# Altium PCB STCLock.PcbDoc
Units mm, origin at the board's own origin, x right, y up, seen from the top; angles counter-clockwise.
Board outline 109.22 x 79.25 mm, 2 copper layers (Top Layer, Bottom Layer); 27 components, 33 nets, 125 pads, 16 vias.
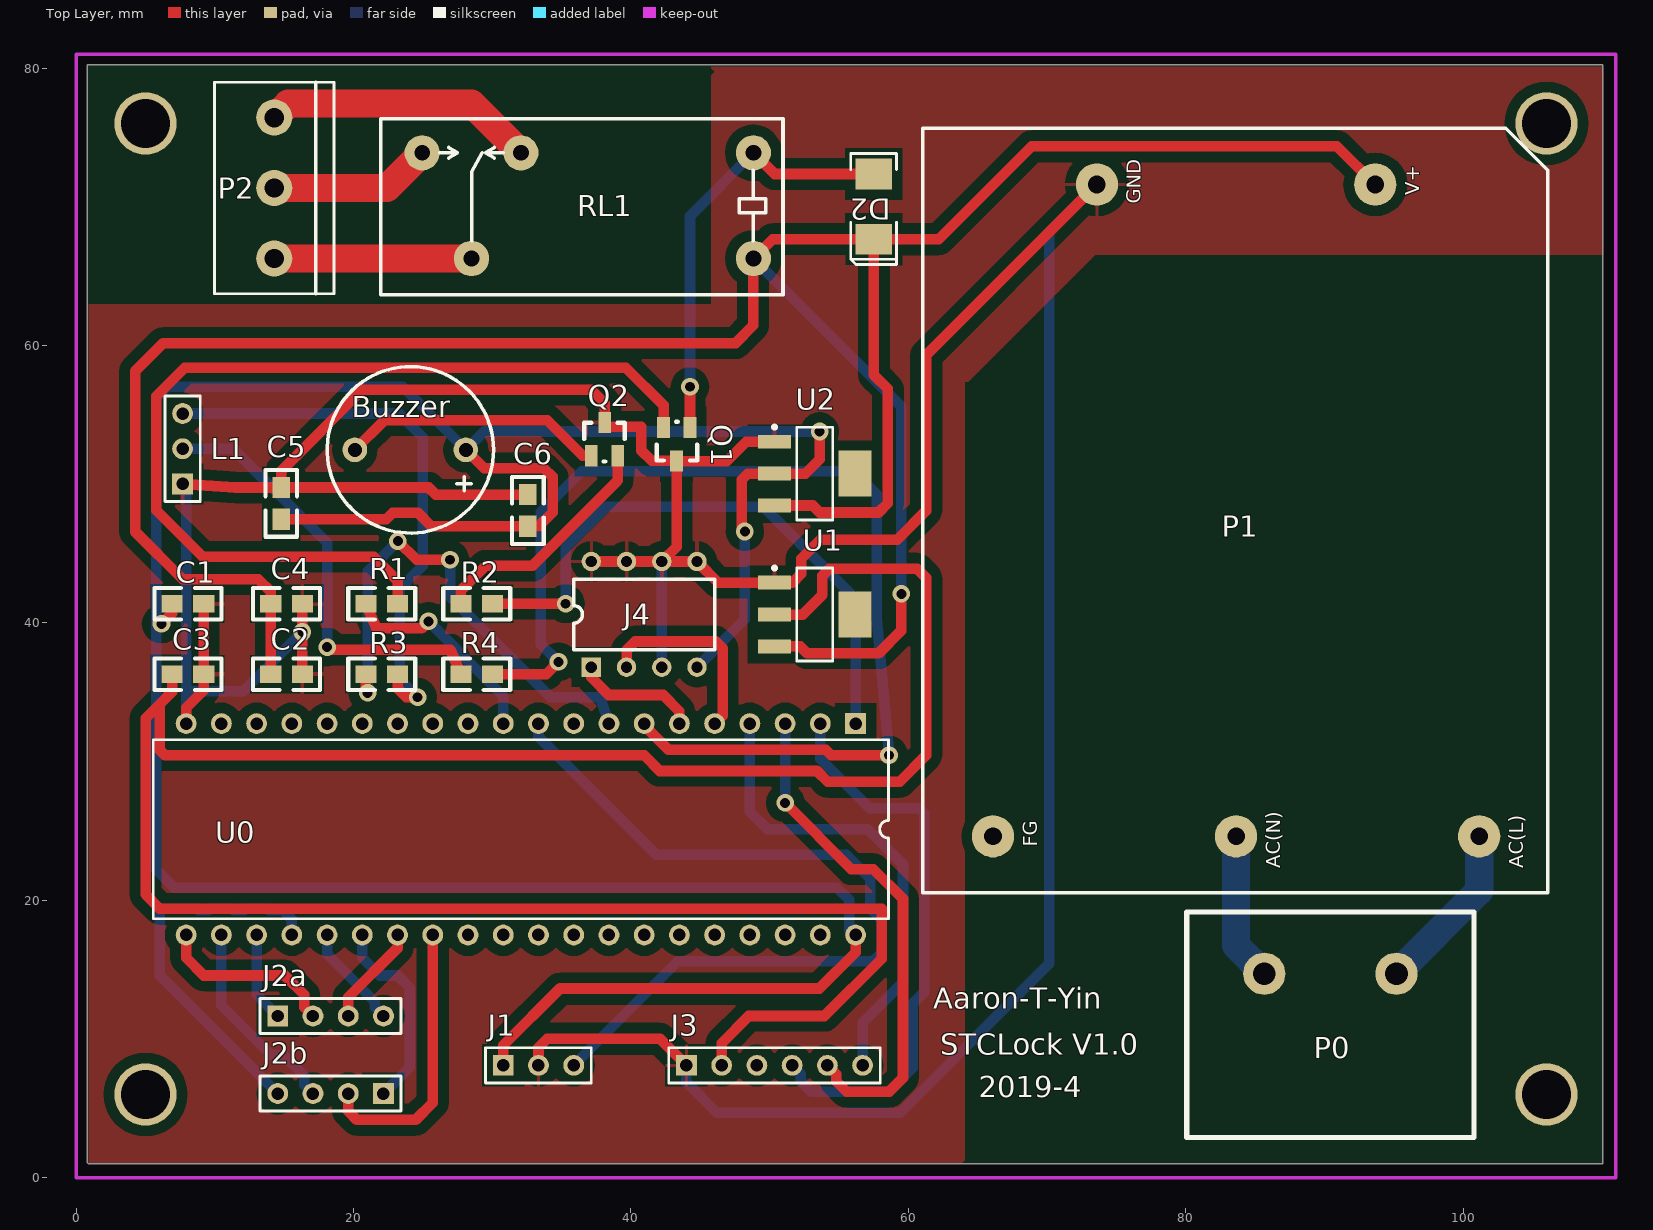
[diagram p0: Top Layer view]
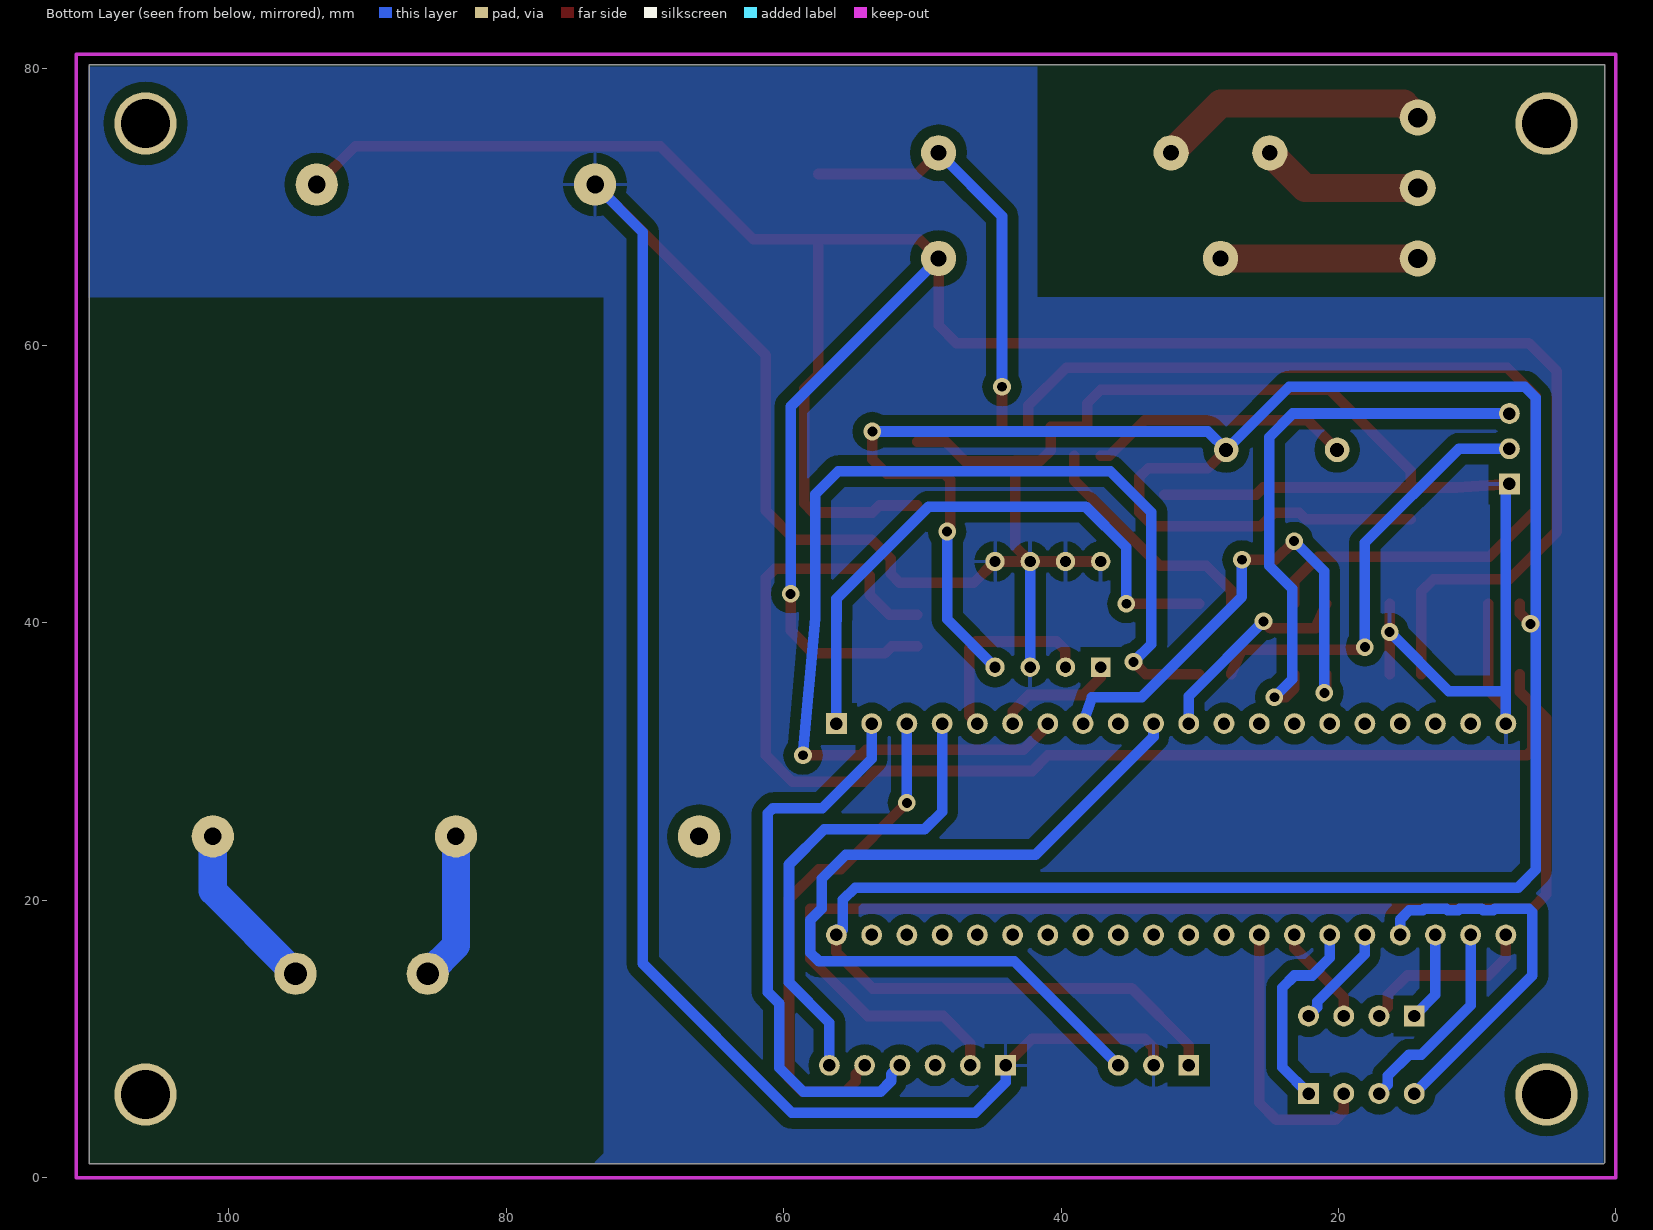
[diagram p1: Bottom Layer view, seen from below]

## Layer stack, top to bottom
Top Layer: signal copper 0.0356
Dielectric: dielectric 0.32, FR-4, Dk 4.8
Bottom Layer: signal copper 0.0356

## Board outline
0.818,80.238 0.818,1.069 0.897,0.99 110.038,0.99 110.038,80.238 0.818,80.238

## Design rules (kind name [scope] priority, off if disabled: settings)
Clearance [All] p1: gap=0.762
FabricationTestPointUsage TestPointUsage [All] p1: valid=0 allowmultiple=FALSE
FabricationTestpoint Testpoint [All] p1: side=3 testpointundercomponent=TRUE minsize=1.016 maxsize=2.54 preferedsize=1.524 minholesize=0 maxholesize=1.016 preferedholesize=0.813 testpointgrid=0.025 allowsidetop=TRUE allowsidebottom=TRUE usegrid=TRUE gridtolerance=0
PolygonConnect [All] p1: connectstyle=Relief reliefconductorwidth=0.254 reliefentries=4 polygonreliefangle="90 Angle"
RoutingLayers [All] p1 off: top layer_v5=TRUE bottom layer_v5=TRUE
RoutingVias [All] p1: holewidth=0.711 width=1.27 viastyle="Through Hole" minholewidth=0.711 minwidth=1.27 maxholewidth=0.711 maxwidth=1.27
SilkscreenOverComponentPads [All] p1: minsilkscreentomaskgap=0.254
SolderMaskExpansion [All] p1: expansion=0.102
Width [All] p1: maxlimit=2.032 minlimit=0.762 preferedwidth=0.762
24 further rules are at their usual default settings.

## Components (designator, comment, footprint, x,y, rotation, side; value= is the part's Value field where it differs from the comment)
Buzzer "Buzzer" BUZ8/12 27.996,52.552 r180 top
C1 "224" 0805 9.2,41.376 r180 top
C2 "224" 0805 16.312,36.296 r180 top
C3 "224" 0805 9.2,36.296 r180 top
C4 "224" 0805 16.312,41.376 r180 top
C5 "103" 0805 14.788,47.472 r90 top
C6 "103" 0805 32.568,46.964 r90 top
D2 "DIODE" 5819 57.46,70.332 r180 top
J1 "GPS" HDR1X3 30.79,8.102 r0 top
J2a "Header 4" HDR1X4 14.534,11.658 r0 top
J2b "Header 4" HDR1X4 22.154,6.07 r180 top
J3 "LCD12864" HDR1X6 43.998,8.102 r0 top
J4 "AT24C02" DIP8 37.14,36.804 r90 top
L1 "LED_3_K" HDR1X3 7.676,50.012 r90 top
P0 "Header 2" DG46G_2 85.654,14.706 r0 top
P1 "LAP5-220SXX" LAP5-220SXX 66.096,24.612 r90 top
P2 "Header 3" 111 14.28,66.268 r90 top
Q1 "3906" SOT-23-et 44.252,54.076 r180 top
Q2 "3906" SOT-23-et 37.14,52.044 r0 top
R1 "Res Semi" 0805 20.884,41.376 r0 top
R2 "Res Semi" 0805 30.028,41.376 r180 top
R3 "Res2" 0805 20.884,36.296 r0 top
R4 "Res2" 0805 30.028,36.296 r180 top
RL1 "G2R-1" G2R-1 48.824,66.268 r180 top
U0 "STC89C52RC" SOT129-1 32.06,25.12 r180 top
U1 "LM1117-3.3V" AMS1117 50.348,42.9 r0 top
U2 "LM1117-5V" AMS1117 50.348,53.06 r0 top

## Footprints (in the part's own frame and the unit in brackets; to place one, negate y for a bottom-side part, rotate by r counter-clockwise, add the part's x,y. Pads: shape width x height; smd on the part's side, far side on the other; paste and mask are expansions set on the pad)
111 [mm]
  round 2.6 hole 1.4: 1(0,0) 2(5.08,0) 3(10.16,0)
  silkscreen extent -2.54,-4.3 12.7,4.3
0805 [mil]
  rect 60x50 smd: 1(0,0) 2(90,0)
  silkscreen extent -50,-45 140,45, body extent 0,-26 90,27, height 20
5819 [mm]
  rect 2.6x2.2 smd: 1(-0.039,-2.028) 2(-0.039,2.672)
  silkscreen extent -1.69,-3.5 1.61,4.5
AMS1117 [mm]
  rect 2.4x1 smd: 1(0,0) 2(0,-2.3) 3(0,-4.6)
  rect 2.4x3.3 smd: 4(5.8,-2.3)
  silkscreen extent -0.12,-5.65 4.2,1.17, body extent 1.05,-5.65 4.75,1.05, height 1.8
BUZ8/12 [mil]
  round 70 hole 40: 1(-3.78,3.11) 2(311.18,3.11)
  silkscreen extent -83,-233 390,239
DG46G_2 [mil]
  round 120 hole 65: 1(0,0) 2(375,0)
  silkscreen extent -220,-465 595,175
DIP8 [mil]
  rect 55x55 hole 32: 1(0,0)
  round 55 hole 32: 2(0,-100) 3(0,-200) 4(0,-300) 5(300,-300) 6(300,-200) 7(300,-100) 8(300,0)
  silkscreen extent 50,-350 250,50
G2R-1 [mil]
  round 100 hole 45: 1(0,-300) 2(660,-300) 3(940,-300) 4(800,0) 5(0,0)
  silkscreen extent -84,-397 1058,103
HDR1X3 [mm] "Connector; Header; 3 Position"
  rect 1.5x1.5 hole 0.9: 1(0,0)
  round 1.5 hole 0.9: 2(2.54,0) 3(5.08,0)
  silkscreen extent -1.27,-1.27 6.35,1.27
HDR1X4 [mm] "Connector; Header; 4 Position"
  rect 1.5x1.5 hole 0.9: 1(0,0)
  round 1.5 hole 0.9: 2(2.54,0) 3(5.08,0) 4(7.62,0)
  silkscreen extent -1.27,-1.27 8.89,1.27
HDR1X6 [mm] "Connector; Header; 6 Position"
  rect 1.5x1.5 hole 0.9: 1(0,0)
  round 1.5 hole 0.9: 2(2.54,0) 3(5.08,0) 4(7.62,0) 5(10.16,0) 6(12.7,0)
  silkscreen extent -1.27,-1.27 13.97,1.27
LAP5-220SXX [mil]
  round 120 hole 50: 1(0,0) 2(0,-690) 3(0,-1380) 4(1850,-1085) 8(1850,-295)
  silkscreen extent -160,-1575 2010,200
SOT129-1 [mm] "DIP; 40 Leads; Row Spacing 15.24 mm; Pitch 2.54 mm"
  rect 1.5x1.5 hole 0.9: 1(-24.13,-7.62)
  round 1.5 hole 0.9: 2(-21.59,-7.62) 3(-19.05,-7.62) 4(-16.51,-7.62) 5(-13.97,-7.62) 6(-11.43,-7.62) 7(-8.89,-7.62) 8(-6.35,-7.62) 9(-3.81,-7.62) 10(-1.27,-7.62) 11(1.27,-7.62) 12(3.81,-7.62) 13(6.35,-7.62) 14(8.89,-7.62) 15(11.43,-7.62) 16(13.97,-7.62) 17(16.51,-7.62) 18(19.05,-7.62) 19(21.59,-7.62) 20(24.13,-7.62) 21(24.13,7.62) 22(21.59,7.62) 23(19.05,7.62) 24(16.51,7.62) 25(13.97,7.62) 26(11.43,7.62) 27(8.89,7.62) 28(6.35,7.62) 29(3.81,7.62) 30(1.27,7.62) 31(-1.27,7.62) 32(-3.81,7.62) 33(-6.35,7.62) 34(-8.89,7.62) 35(-11.43,7.62) 36(-13.97,7.62) 37(-16.51,7.62) 38(-19.05,7.62) 39(-21.59,7.62) 40(-24.13,7.62)
  silkscreen extent -26.5,-6.45 26.5,6.45
SOT-23-et [mil]
  rect 36x60 smd: 1(0,0) 2(75,0) 3(38,95)
  silkscreen extent -21,-16 95,94

## Part data
Buzzer: "Magnetic Transducer Buzzer"
C1 C2 C3 C4 C5 C6: library part CAP, "Capacitor"
D2: "Diode"
J1: library part "Header 3", "Header, 3-Pin"
J2a J2b: "Header, 4-Pin"
J3: library part "Header 6", "Header, 6-Pin"
J4: library part LM75A
P0: "Header, 2-Pin"
P2: "Header, 3-Pin"
Q1 Q2: library part 2N3906, "PNP General Purpose Amplifier"
R1 R2: "Semiconductor Resistor"
R3 R4: "Resistor"
U0: library part P89C51X2BN, "80C51 8-Bit Flash Microcontroller Family, 4 kB Flash"
U1 U2: library part LM1117

## Free pads (board coordinates)
  round 4.5 hole 3.5: 0(5,76) 1(5,6) 2(106,76) 3(106,6)

## Via types
v1: diameter 1.27, hole 0.711, Top Layer to Bottom Layer, 16 vias

## Nets (pads, with @x,y where several pads share a name; then routed paths per layer and width w, separated by ;. In a path a pad name is that pad's centre, name@x,y a point inside that pad or via, vN(x,y) a via of type N, cw(c..) or ccw(c..) an arc to the next point about the centre after c; other vN are vias at no path point)
+3.3V: C3.2 J3.2 U1.2 | length 175.9
  Top Layer w0.762: C3.2 6.914,35.026 6.025,34.137 ; J3.2 46.538,9.702 48.494,11.658 53.943,11.658 58.083,15.798 58.083,19.393 6.037,19.393 5.009,20.421 5.009,33.121 6.025,34.137 ; U1.2 52.38,40.6 53.802,42.022 53.802,43.408 54.281,43.886 60.635,43.886 61.27,43.251 61.27,30.454 59.365,28.549 54.183,28.549 53.409,29.323 42.075,29.323 40.944,30.454 6.406,30.454 6.025,30.835 6.025,34.137
+5V: Buzzer.1 C1.2 C5.1 C6.1 J1.1 J4.4 U0.40 U2.2 | length 225.1
  Top Layer w0.762: v1(6.152,39.928) 6.914,40.69 C1.2 ; C5.1 22.357,47.472 22.812,47.927 24.643,47.927 25.606,46.964 C6.1 33.33,46.964 34.346,47.98 34.346,50.52 33.711,51.155 29.41,51.155 Buzzer.1 ; J1.1 30.79,9.55 34.879,13.639 53.574,13.639 56.19,16.255 U0.40 ; v1(48.214,46.583) 47.986,46.812 47.986,50.328 48.418,50.76 U2.2 52.569,50.76 53.599,51.79 v1(53.599,53.797)
  Bottom Layer w0.762: v1(6.152,39.928) v1@5.771,40.309 ; J4.4 48.214,40.258 v1(48.214,46.583) ; v1(53.599,53.797) 29.416,53.797 Buzzer.1 23.543,57.022 6.558,57.022 5.771,56.235 v1@5.771,40.309 ; U0.40 56.19,17.869 55.722,17.869 55.722,20.029 54.835,20.917 7.053,20.917 5.771,22.199 v1@5.771,40.309
+12V: C2.2 C4.2 D2.2 P1.4 RL1.5 U1.3 U2.3 | length 198.6
  Top Layer w0.762: C2.2 C4.2 14.026,42.265 13.137,43.154 7.676,43.154 4.247,46.583 4.247,58.14 6.279,60.172 47.554,60.172 48.824,61.442 RL1.5 50.216,67.66 D2.2 ; U1.3 52.205,38.3 52.71,37.795 57.841,37.795 59.492,39.446 v1(59.492,42.087) ; U2.3 53.094,48.46 53.599,47.955 57.841,47.955 58.501,48.615 58.501,56.87 57.499,57.872 D2.2 ; P1.4 90.886,74.371 68.895,74.371 62.184,67.66 D2.2
  Bottom Layer w0.762: RL1.5 59.492,55.6 v1(59.492,42.087)
BUZZER: R2.1 U0.1 | length 43.2
  Top Layer w0.762: R2.1 v1(35.286,41.376)
  Bottom Layer w0.762: v1(35.286,41.376) 35.286,45.44 38.232,48.386 49.535,48.386 56.184,41.737 56.184,40.182 56.19,40.176 U0.1
CLOSELOCK: R4.1 U0.7 | length 80.1
  Top Layer w0.762: R4.1 33.889,36.296 v1(34.778,37.185) ; U0.7 40.95,32.603 42.706,30.847 54.041,30.847 54.434,30.454 v1(58.603,30.454)
  Bottom Layer w0.762: v1(34.778,37.185) 33.508,38.455 33.508,47.98 36.454,50.926 56.063,50.926 57.708,49.281 57.708,40.33 v1(58.603,30.454)
GND: C1.1 C2.1 C3.1 C4.1 C5.2 C6.2 J1.2 J3.1 J4.3 J4.5 J4.6 J4.7 J4.8 L1.1 P1.8 Q1.3 Q2.3 U0.20 U1.1 U2.1 | length 285.6
  Top Layer w0.762: L1.1 11.486,49.758 C5.2 ; U0.20 7.93,33.883 9.2,35.153 C3.1 C1.1 ; C2.1 v1(16.312,39.344) C4.1 ; C6.2 25.913,49.25 25.405,49.758 C5.2 ; J1.2 33.33,9.372 33.965,10.007 42.093,10.007 J3.1 ; J4.8 J4.7 J4.6 ; U2.1 48.299,53.06 46.902,51.663 Q1.3 ; P1.8 61.27,59.283 61.27,48.082 59.187,45.999 53.65,45.999 52.278,44.627 52.278,43.535 51.643,42.9 U1.1 46.284,42.9 J4.5 J4.6 ; C5.2 14.788,50.952 20.63,56.794 37.14,56.794 38.105,55.829 Q2.3 38.105,54.152 40.747,54.152 40.747,52.425 41.483,51.688 43.287,51.688 Q1.3 ; J4.6 43.287,45.491 Q1.3
  Bottom Layer w0.762: L1.1 7.93,49.758 7.93,35.077 ; U0.20 7.93,35.077 ; v1(16.312,39.344) 12.045,35.077 7.93,35.077 ; J4.3 J4.6 ; J3.1 43.998,6.883 46.196,4.685 59.401,4.685 70.16,15.444 70.16,68.173 P1.8
GPS: J1.3 U0.10 | length 60.4
  Bottom Layer w0.762: U0.10 33.33,31.8 41.839,23.291 55.53,23.291 57.257,21.564 57.257,19.405 58.083,18.579 58.083,16.23 57.448,15.595 43.363,15.595 J1.3
KEYC1: J2a.4 U0.25 | length 7.5
  Bottom Layer w0.762: U0.25 18.09,16.103 21.519,12.674 21.519,12.293 J2a.4
KEYC2: J2b.1 U0.26 | length 14.4
  Bottom Layer w0.762: U0.26 20.63,15.849 21.9,14.579 23.17,14.579 24.059,13.69 24.059,7.975 J2b.1
KEYC3: J2a.3 U0.27 | length 7.3
  Top Layer w0.762: J2a.3 19.614,13.004 23.17,16.56 U0.27
KEYC4: J2b.2 U0.28 | length 20.2
  Top Layer w0.762: J2b.2 19.614,4.8 20.249,4.165 24.465,4.165 25.71,5.41 U0.28
KEYR1: J2a.2 U0.21 | length 13.1
  Top Layer w0.762: U0.21 7.93,15.849 9.2,14.579 15.042,14.579 16.439,13.182 16.439,12.293 J2a.2
KEYR2: J2b.3 U0.22 | length 14.7
  Bottom Layer w0.762: U0.22 10.47,12.42 14.026,8.864 14.915,8.864 16.439,7.34 16.439,6.705 J2b.3
KEYR3: J2a.1 U0.23 | length 6.5
  Bottom Layer w0.762: U0.23 13.01,13.182 J2a.1
KEYR4: J2b.4 U0.24 | length 27.9
  Bottom Layer w0.762: J2b.4 6.025,14.579 6.025,19.151 6.267,19.393 8.714,19.393 8.829,19.278 9.571,19.278 9.686,19.393 11.254,19.393 11.369,19.278 12.111,19.278 12.226,19.393 13.794,19.393 13.909,19.278 14.89,19.278 15.55,18.618 U0.24
LCDCS: J3.4 U0.2 | length 40.8
  Bottom Layer w0.762: J3.4 52.253,7.467 52.253,6.971 53.015,6.209 58.591,6.209 60.305,7.923 60.305,12.559 61.131,13.385 61.131,26.275 60.762,26.644 57.206,26.644 53.65,30.2 U0.2
LCDSCLK: J3.6 U0.4 | length 34.6
  Bottom Layer w0.762: U0.4 48.57,26.39 49.84,25.12 57.067,25.12 59.607,22.58 59.607,14.083 56.698,11.174 J3.6
LCDSTD: J3.5 U0.3 | length 36.9
  Top Layer w0.762: v1(51.11,27.025) 55.89,22.245 57.46,22.245 59.607,20.098 59.607,7.201 58.603,6.197 55.555,6.197 54.793,6.959 54.793,7.467 J3.5
  Bottom Layer w0.762: v1(51.11,27.025) U0.3
NetBuzzer_2: Buzzer.2 Q2.1 | length 19
  Top Layer w0.762: Buzzer.2 22.228,54.609 33.957,54.609 36.522,52.044 Q2.1
NetD2_1: D2.1 Q1.1 RL1.1 | length 31
  Top Layer w0.762: Q1.1 v1(44.252,57.022) ; RL1.1 50.352,72.36 D2.1
  Bottom Layer w0.762: v1(44.252,57.022) 44.252,69.316 RL1.1
NetL1_2: L1.2 R4.2 | length 31.6
  Top Layer w0.762: v1(18.09,38.252) 18.268,38.074 26.98,38.074 R4.2
  Bottom Layer w0.762: L1.2 11.308,52.552 18.09,45.77 v1(18.09,38.252)
NetL1_3: L1.3 R3.2 | length 40.7
  Top Layer w0.762: R3.2 23.17,35.28 23.805,34.645 24.609,34.645 v1(24.621,34.633)
  Bottom Layer w0.762: L1.3 23.297,55.092 24.996,53.393 24.996,44.117 23.331,42.452 23.331,35.923 v1(24.621,34.633)
NetP0_1: P0.1 P1.2 | length 10.7
  Bottom Layer w2.032: P1.2 83.622,16.738 P0.1
NetP0_2: P0.2 P1.3 | length 12.4
  Bottom Layer w2.032: P0.2 101.148,20.675 P1.3
NetP2_1: P2.1 RL1.4 | length 14.2
  Top Layer w2.032: P2.1 RL1.4
NetP2_2: P2.2 RL1.3 | length 11.7
  Top Layer w2.032: P2.2 22.408,71.348 RL1.3
NetP2_3: P2.3 RL1.2 | length 19.7
  Top Layer w2.032: P2.3 15.296,77.444 28.504,77.444 RL1.2
NetQ1_2: Q1.2 R1.2 | length 69.5
  Top Layer w0.762: R1.2 23.17,43.024 21.44,44.754 9.124,44.754 5.771,48.107 5.771,56.337 7.828,58.394 39.629,58.394 42.347,55.676 Q1.2
NetQ2_2: Q2.2 R2.2 | length 17.3
  Top Layer w0.762: R2.2 27.742,42.341 29.52,44.119 32.898,44.119 39.045,50.266 Q2.2
OPENLOCK: R3.1 U0.8 | length 36.1
  Top Layer w0.762: R3.1 20.884,35.077 v1(21.011,34.95) ; v1(23.195,45.897) 24.542,44.551 v1(26.955,44.551)
  Bottom Layer w0.762: v1(21.011,34.95) 21.011,43.713 v1(23.195,45.897) ; v1(26.955,44.551) 26.955,41.884 34.194,34.645 37.775,34.645 U0.8
RELAY: R1.1 U0.11 | length 15.5
  Top Layer w0.762: R1.1 21.646,39.598 24.897,39.598 v1(25.405,40.106)
  Bottom Layer w0.762: v1(25.405,40.106) 30.79,34.721 U0.11
ROMSCL: J4.2 U0.5 | length 14.3
  Top Layer w0.762: J4.2 39.68,38.023 40.315,38.658 46.106,38.658 46.614,38.15 46.614,33.324 U0.5
ROMSTD: J4.1 U0.6 | length 9
  Top Layer w0.762: J4.1 37.14,36.067 38.41,34.797 42.322,34.797 43.49,33.629 U0.6
pads on no net: J3.3 P1.1 U0.9 U0.12 U0.13 U0.14 U0.15 U0.16 U0.17 U0.18 U0.19 U0.29 U0.30 U0.31 U0.32 U0.33 U0.34 U0.35 U0.36 U0.37 U0.38 U0.39 U1.4 U2.4

## Polygon pours and split planes (outlines as drawn)
GND on Top Layer "Top Layer-No Net" (solid, pour order 1000): 46.03,79.73 45.776,79.476 45.776,62.966 0.818,62.966 0.31,62.458 0.31,0.99 63.81,0.99 64.064,1.244 64.064,57.378 64.318,57.378 73.208,66.268 73.462,66.522 110.8,66.522 110.8,80.746 45.776,80.746 45.776,79.984 46.03,79.73
GND on Bottom Layer "Top Layer-No Net" (solid, pour order 1001): 41.712,80.746 41.712,63.474 0.31,63.474 0.31,0.99 73.716,0.99 72.954,1.752 72.954,63.474 110.8,63.474 110.8,80.492 42.22,80.492 41.966,80.746 41.712,80.746

## Keep-outs
Keep-Out Layer:
  lines w0.254: 0,0 0,81 111,81 111,0 0,0

## Silkscreen, mask and mechanical layers (free items; w line width, h text height)
Top Overlay:
  text "Aaron-T-Yin" at 61.778,12.166 h1.52
  text "STCLock V1.0" at 62.286,8.864 h1.52
  text "2019-4" at 65.08,5.816 h1.52

## Text inside footprints (layer, text, board x,y; h text height)
P1: Top Overlay "GND" at 76.764,70.205 h1.02 r90; Top Overlay "V+" at 96.83,70.84 h1.02 r90; Top Overlay "AC(L)" at 104.323,22.326 h1.02 r90; Top Overlay "AC(N)" at 86.797,22.326 h1.02 r90; Top Overlay "FG" at 69.271,23.85 h1.02 r90